# Altium PCB PCB IMU module.PcbDoc
Units mm, origin at the board's own origin, x right, y up, seen from the top; angles counter-clockwise.
Board outline 25 x 26.25 mm, 4 copper layers (L1(Sig), L2(GND), L3(GND), L4(Sig)), stack 0.749 mm thick; 55 components, 29 nets, 197 pads, 143 vias.
Unrouted connection lines stored in the file: 12.
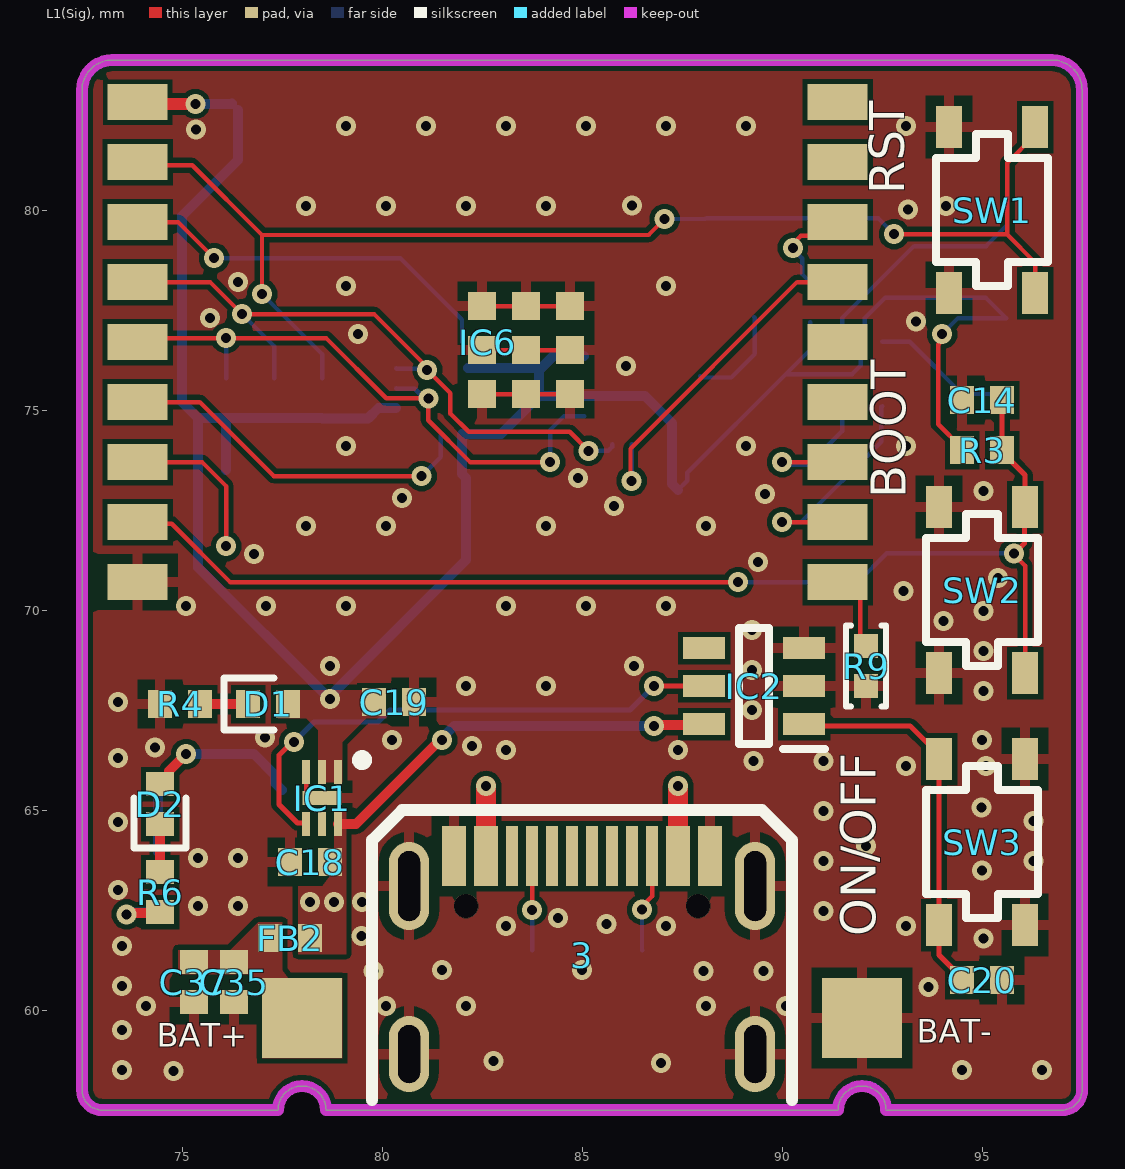
[diagram p0: L1(Sig) view]
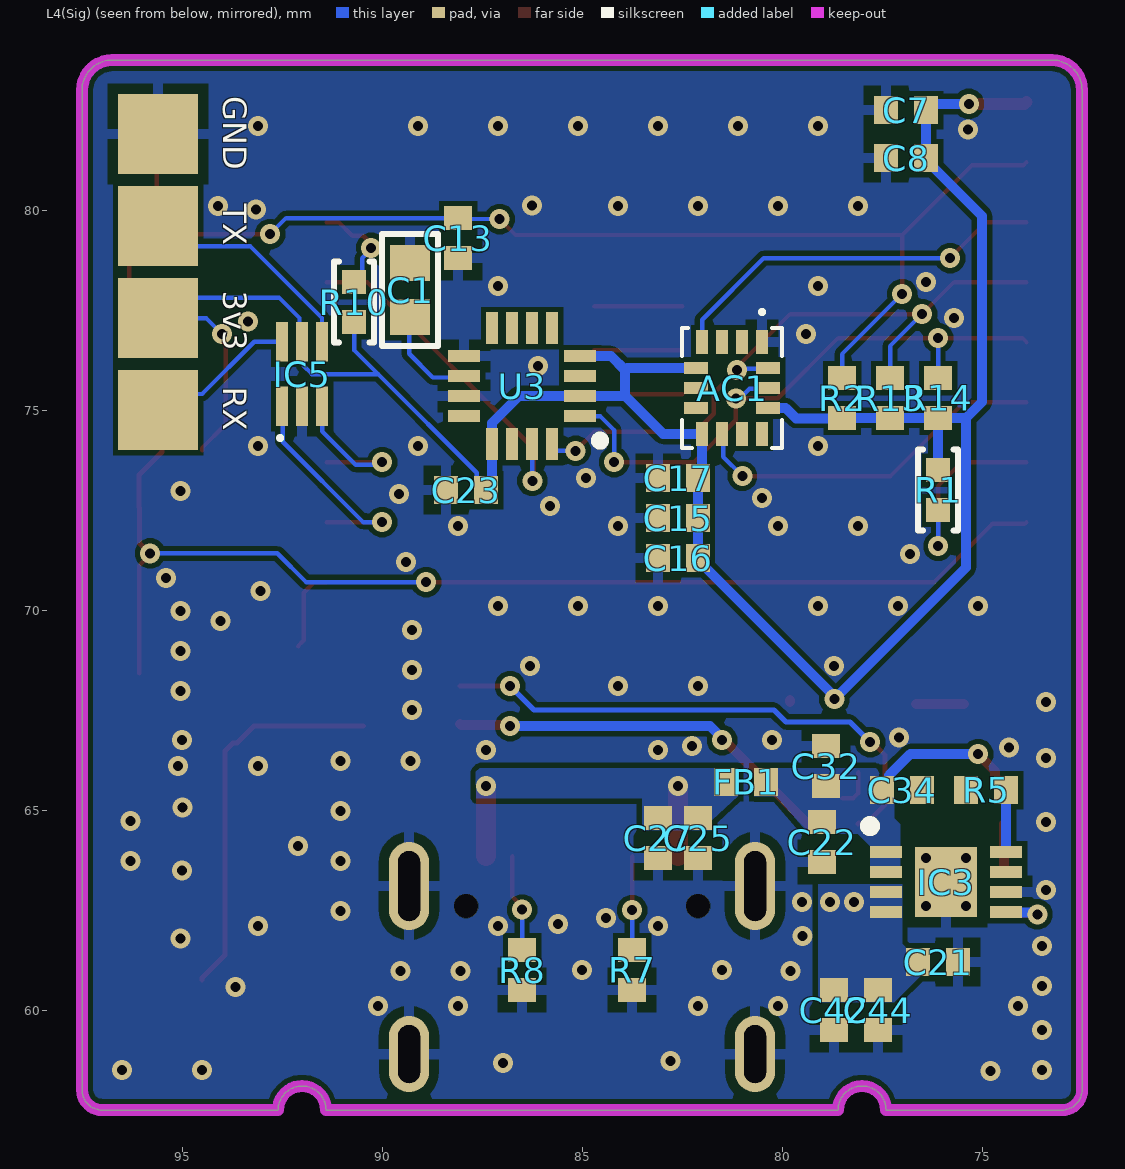
[diagram p1: L4(Sig) view, seen from below]
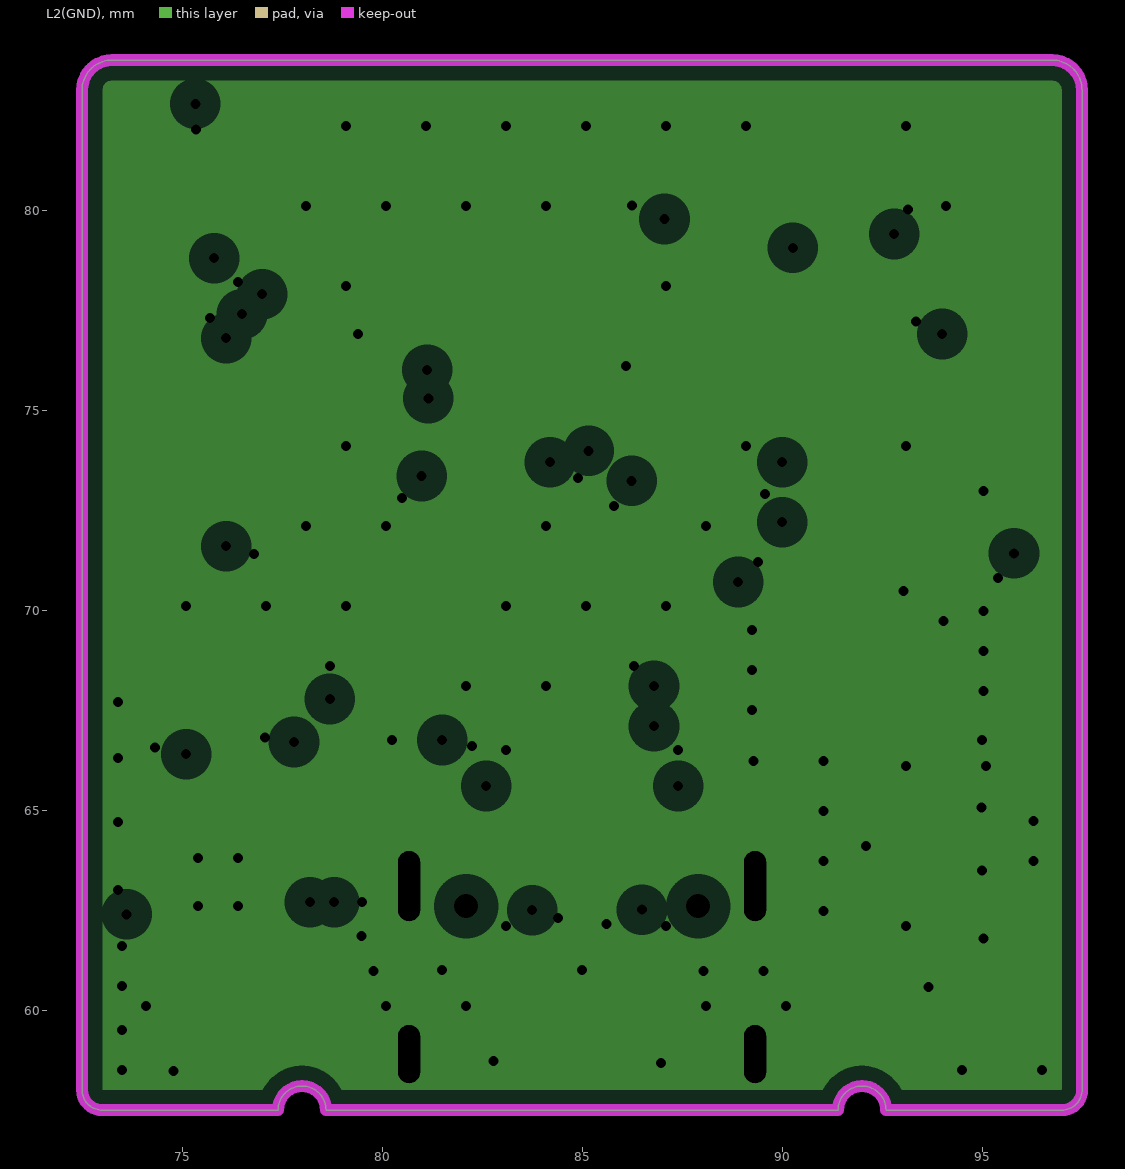
[diagram p2: L2(GND), clearances drawn from the general rule]
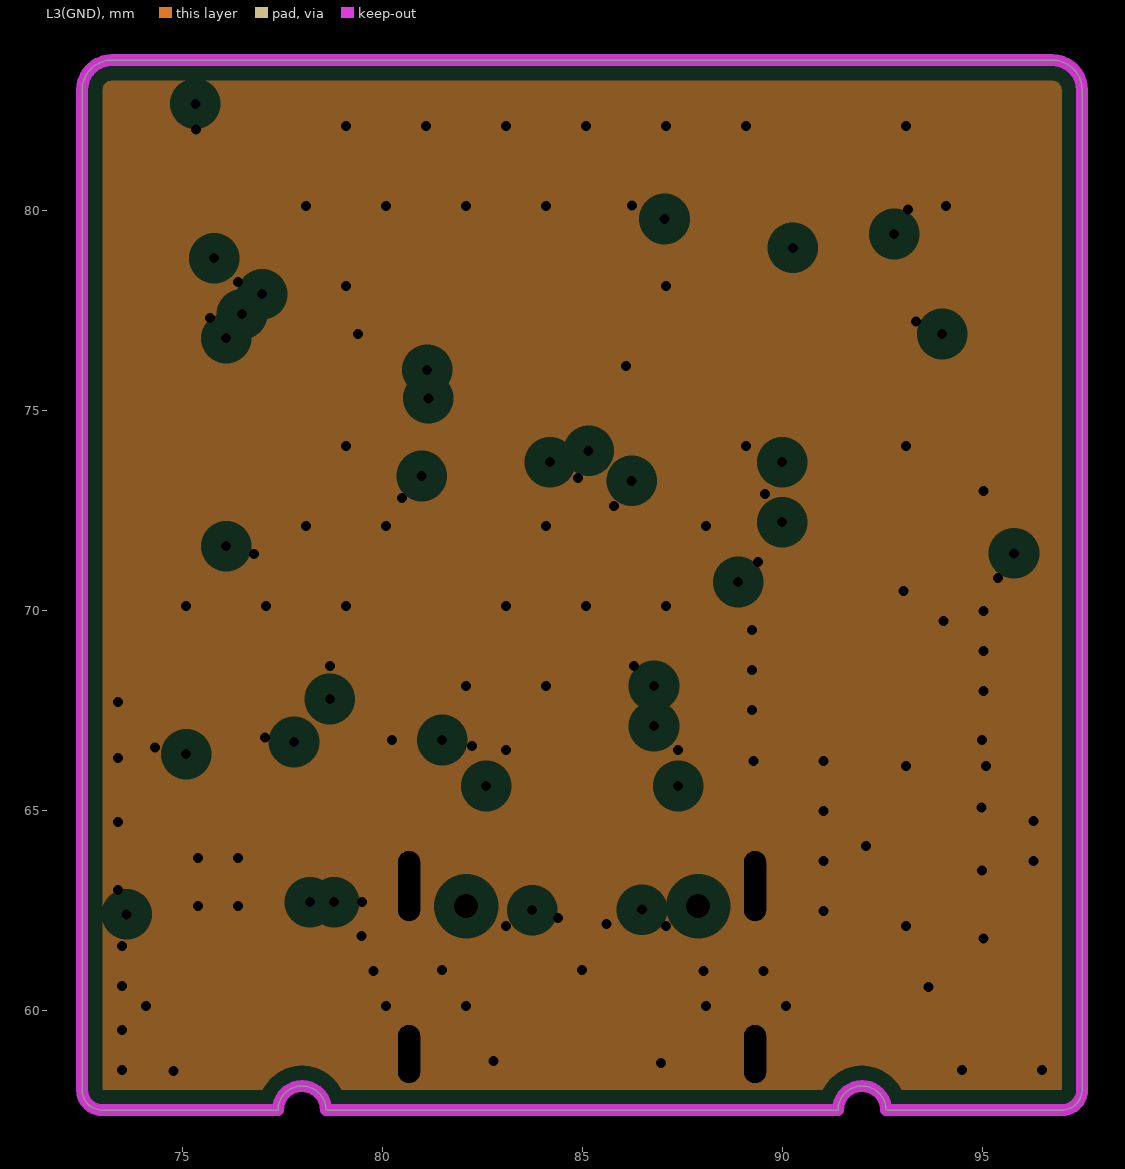
[diagram p3: L3(GND), clearances drawn from the general rule]

## Layer stack, top to bottom
Top Solder: solder mask 0.0254, SM-001, Dk 3.8
L1(Sig): signal copper 0.035
Dielectric 2: prepreg 0.0994, PP-017, Dk 4.1
L2(GND): plane copper 0.0152, net GND
Dielectric 1: core 0.45, Core-039, Dk 4.6
L3(GND): plane copper 0.0152, net GND
Dielectric 3: prepreg 0.0994, PP-017, Dk 4.1
L4(Sig): signal copper 0.035
Bottom Solder: solder mask 0.0254, SM-001, Dk 3.8

## Board outline
73,57.5 77.4,57.5 cw(c78,57.5) 78,58.1 cw(c78,57.5) 78.6,57.5 91.4,57.5 cw(c92,57.5) 92,58.1 cw(c92,57.5) 92.6,57.5 97,57.5 ccw(c97,58) 97.5,58 97.5,83 ccw(c96.75,83) 96.75,83.75 73.25,83.75 ccw(c73.25,83) 72.5,83 72.5,58 ccw(c73,58)

## Design rules (kind name [scope] priority, off if disabled: settings)
Clearance MicroVia [AsMM(ViaDiameter) = 0.3 vs AsMM(ViaDiameter) = 0.3] p1: gap=0.1 ignorepadtopadclearanceinfootprint=FALSE
Clearance USB_Poly_Clearance [(InNamedPolygon('Top_Layer-GND')) vs (OnLayer('Mechanical 3'))] p2: gap=0.254 ignorepadtopadclearanceinfootprint=FALSE except(0: Arc-Hole Track-Hole SMDPad-Hole THPad-Hole Via-Hole Fill-Hole Poly-Hole Region-Hole Text-Hole)
Clearance USB_Clearance [(InDifferentialPairClass('All Differential Pairs'))] p3: gap=0.254 ignorepadtopadclearanceinfootprint=FALSE except(0: Arc-Hole Track-Hole SMDPad-Hole THPad-Hole Via-Hole Fill-Hole Poly-Hole Region-Hole Text-Hole; 0.127: SMDPad-SMDPad)
Clearance ANT_Clerance [InNet('ANT')] p4: gap=0.203 ignorepadtopadclearanceinfootprint=FALSE except(0: Arc-Hole Track-Hole SMDPad-Hole THPad-Hole Via-Hole Fill-Hole Poly-Hole Region-Hole Text-Hole)
Clearance Polygon_Clearance [(InNamedPolygon('Top_Layer-GND')) or (InNamedPolygon('Bottom_Layer-GND'))] p5: gap=0.254 ignorepadtopadclearanceinfootprint=FALSE except(0: Arc-Hole Track-Hole SMDPad-Hole THPad-Hole Via-Hole Fill-Hole Poly-Hole Region-Hole Text-Hole)
Clearance [All] p6: gap=0.125 ignorepadtopadclearanceinfootprint=FALSE except(0: Arc-Hole Track-Hole SMDPad-Hole THPad-Hole Via-Hole Fill-Hole Poly-Hole Region-Hole Text-Hole)
ComponentClearance [All] p1 off: gap=0.254 collisioncheckmode=3 verticalgap=0.254 showdistances=FALSE
DiffPairsRouting DiffPair_mcuDiffPairsRouting [InDifferentialPair ('NewDifferentialPair2')] p1: maxlimit=0.254 minlimit=0.254 mostfreqgap=0.254 toplayer_minwidth=0.166 toplayer_maxwidth=0.166 toplayer_prefwidth=0.166 bottomlayer_minwidth=0.166 bottomlayer_maxwidth=0.166 bottomlayer_prefwidth=0.166 maxuncoupledlength=12.7
DiffPairsRouting DiffPair_USBDiffPairsRouting [InDifferentialPair ('NewDifferentialPair1')] p2: maxlimit=0.254 minlimit=0.254 mostfreqgap=0.254 toplayer_minwidth=0.166 toplayer_maxwidth=0.166 toplayer_prefwidth=0.166 bottomlayer_minwidth=0.166 bottomlayer_maxwidth=0.166 bottomlayer_prefwidth=0.166 maxuncoupledlength=12.7
FabricationTestPointUsage TestPointUsage [All] p1: valid=0 allowmultiple=FALSE
FabricationTestpoint Testpoint [All] p1: side=3 testpointundercomponent=TRUE minsize=1.016 maxsize=2.54 preferedsize=1.524 minholesize=0 maxholesize=1.016 preferedholesize=0.813 testpointgrid=0.025 allowsidetop=TRUE allowsidebottom=TRUE usegrid=TRUE gridtolerance=0
Height [All] p1 off: minheight=0 maxheight=25.4 prefheight=12.7
HoleSize [All] p1: absolutevalues=TRUE maxlimit=5 minlimit=0.1 maxpercent=80.000 minpercent=20.000
HoleToHoleClearance HoleToHoleClearance_L1L2 [InDrillLayerPair('Top Layer - Mid-Layer 1') vs InDrillLayerPair('Top Layer - Mid-Layer 1')] p1: gap=0.225 allowstackedmicrovias=TRUE
HoleToHoleClearance HoleToHoleClearance_L1L2_L1L3 [InDrillLayerPair('Top Layer - Mid-Layer 1') vs InDrillLayerPair('Top Layer - Mid-Layer 2')] p2: gap=0.225 allowstackedmicrovias=TRUE
HoleToHoleClearance HoleToHoleClearance_L1L3 [InDrillLayerPair('Top Layer - Mid-Layer 2') vs InDrillLayerPair('Top Layer - Mid-Layer 2')] p3: gap=0.225 allowstackedmicrovias=TRUE
HoleToHoleClearance HoleToHoleClearance_L1L3_L3L4 [InDrillLayerPair('Top Layer - Mid-Layer 2') vs InDrillLayerPair('Mid-Layer 2 - Mid-Layer 3')] p4: gap=0.225 allowstackedmicrovias=TRUE
HoleToHoleClearance HoleToHoleClearance_L3L4 [InDrillLayerPair('Mid-Layer 2 - Mid-Layer 3') vs InDrillLayerPair('Mid-Layer 2 - Mid-Layer 3')] p5: gap=0.225 allowstackedmicrovias=TRUE
HoleToHoleClearance HoleToHoleClearance_L3L4_L4L6 [InDrillLayerPair('Mid-Layer 2 - Mid-Layer 3') vs InDrillLayerPair('Mid-Layer 3 - Bottom Layer')] p6: gap=0.225 allowstackedmicrovias=TRUE
HoleToHoleClearance HoleToHoleClearance_L4L6 [InDrillLayerPair('Mid-Layer 3 - Bottom Layer') vs InDrillLayerPair('Mid-Layer 3 - Bottom Layer')] p7: gap=0.225 allowstackedmicrovias=TRUE
HoleToHoleClearance HoleToHoleClearance_L1L2_L1L6 [InDrillLayerPair('Top Layer - Mid-Layer 1') vs InDrillLayerPair('Top Layer - Bottom Layer')] p8: gap=0.275 allowstackedmicrovias=FALSE
HoleToHoleClearance HoleToHoleClearance_L1L3_L1L6 [InDrillLayerPair('Top Layer - Mid-Layer 2') vs InDrillLayerPair('Top Layer - Bottom Layer')] p9: gap=0.275 allowstackedmicrovias=FALSE
HoleToHoleClearance HoleToHoleClearance_L3L4_L1L6 [InDrillLayerPair('Mid-Layer 2 - Mid-Layer 3') vs InDrillLayerPair('Top Layer - Bottom Layer')] p10: gap=0.275 allowstackedmicrovias=FALSE
HoleToHoleClearance HoleToHoleClearance_L4L6_L1L6 [InDrillLayerPair('Mid-Layer 3 - Bottom Layer') vs InDrillLayerPair('Top Layer - Bottom Layer')] p11: gap=0.275 allowstackedmicrovias=FALSE
HoleToHoleClearance HoleToHoleClearance_L1L6 [InDrillLayerPair('Top Layer - Bottom Layer') vs InDrillLayerPair('Top Layer - Bottom Layer')] p12: gap=0.45 allowstackedmicrovias=FALSE
HoleToHoleClearance [All] p13: gap=0.254 allowstackedmicrovias=TRUE
MatchedLengths DiffPair_mcuMatchedLengths [InDifferentialPair ('NewDifferentialPair2')] p1: tolerance=25.4 checknetsindiffpair=FALSE checkdiffpairvsdiffpair=TRUE checkxsignals=TRUE checkothers=TRUE
MatchedLengths DiffPair_USBMatchedLengths [InDifferentialPair ('NewDifferentialPair1')] p2: tolerance=25.4 checknetsindiffpair=FALSE checkdiffpairvsdiffpair=TRUE checkxsignals=TRUE checkothers=TRUE
MatchedLengths DiffPair_DIFF_USBMatchedLengths [InDifferentialPairClass('DIFF_USB')] p3: tolerance=25.4 checknetsindiffpair=FALSE checkdiffpairvsdiffpair=TRUE checkxsignals=TRUE checkothers=TRUE
MinimumAnnularRing [All] p1 off: minimumring=0.152
MinimumSolderMaskSliver [HasFootprint('ALL')] p1: minsoldermaskwidth=0.097
NetAntennae [All] p1 off: netantennaetolerance=0
PlaneClearance [All] p1: clearance=0.508
PlaneConnect [All] p1: planeconnectstyle=Direct reliefexpansion=0.508 reliefentries=4 reliefconductorwidth=0.254 reliefairgap=0.254
PolygonConnect PolygonConnect_1 [isVia and innet(gnd) or isVia and innet('VDD') or InNet('NetBAT+_1') or InNet('Vbat') or InNet('VDD')or InNet('Vin') or InNet('NetC9_2')or InNet('3v3')] p1: connectstyle=Direct reliefconductorwidth=0.254 reliefentries=4 polygonreliefangle="90 Angle" airgapwidth=0.254
PolygonConnect [All] p2: connectstyle=Relief reliefconductorwidth=0.254 reliefentries=4 polygonreliefangle="90 Angle" airgapwidth=0.254
RoutingVias [All] p1: holewidth=0.25 width=0.5 viastyle="Through Hole" minholewidth=0.1 minwidth=0.1 maxholewidth=0.711 maxwidth=1.27
SilkToSolderMaskClearance SilkscreenOverComponentPads [HasFootprint('All')] p1: minsilkscreentomaskgap=0.254 clearancetoexposedcopper=TRUE
SolderMaskExpansion SolderMaskExpansion_via [IsVia] p1: expansion=0.076 istentingtop=TRUE
SolderMaskExpansion [All] p2: expansion=0.076 istentingtop=FALSE
UnRoutedNet [InNet('ANT')] p1:
Width [All] p1: maxlimit=10.16 minlimit=0.11 preferedwidth=0.125 minimp=50.000000 maximp=50.000000 favimp=50.000000
17 further rules are at their usual default settings.

## Classes and differential pairs
component class Designator: 3v3 C7 C8 C13 C14 GND IC5 IC6 R1 R2 R3 R9 R10 R13 R14 RX SW1 SW2 TX

## Components (designator, comment, footprint, x,y, rotation, side; value= is the part's Value field where it differs from the comment)
3 "TYPE-C-31-M-12" TYPE-C-31-M-12 85,61 r0 top (schematic designator J1)
3v3 "3v3" PAD_SQ_2MM 95.6,77.3 r270 bottom
AC1 "ICM-40627" ICM-40627 81.25,75.55 r270 bottom
BAT+ "BAT+" PAD_SQ_2MM 78,59.8 r90 top
BAT- "BAT-" PAD_SQ_2MM 92,59.8 r90 top
C1 "Ceramic_Capacitor" "CAP 0603/1608" 89.3,78 r90 bottom value=10µF
C7 "C0402_10V" CAP_0402 76.9,82.5 r180 bottom value=10uF
C8 "C0402_10V" CAP_0402 76.9,81.3 r180 bottom value=100nF
C13 "C0402_10V" CAP_0402 88.1,79.3 r270 bottom value=100nF
C14 "C0402_10V" CAP_0402 95,75.25 r180 top value=100nF
C15 "C0402_10V" CAP_0402 82.6,72.3 r180 bottom value=10nF
C16 "C0402_10V" CAP_0402 82.6,71.3 r180 bottom value=100nF
C17 "C0402_10V" CAP_0402 82.6,73.3 r180 bottom value=2.2uF
C18 "C0402_10V" CAP_0402 78.2,63.7 r0 top value=2.2uF
C19 "C0402_10V" CAP_0402 80.3,67.7 r180 top value=2.2uF
C20 "C0402_10V" CAP_0402 95,60.75 r0 top value=100nF
C21 "C0402_10V" CAP_0402 76.1,61.2 r0 bottom value=4.7uF
C22 "C0402_10V" CAP_0402 79,64.2 r90 bottom value=4.7uF
C23 "C0402_10V" CAP_0402 87.9,73 r180 bottom value=4.7uF
C25 "C0402_10V" CAP_0402 82.1,64.3 r90 bottom value=10uF
C27 "C0402_10V" CAP_0402 83.1,64.3 r90 bottom value=100nF
C32 "C0402_10V" CAP_0402 78.9,66.1 r270 bottom value=100nF
C34 "C0402_10V" CAP_0402 77,65.5 r0 bottom value=10uF
C35 "C0402_10V" CAP_0402 76.3,60.7 r90 top value=10uF
C37 "C0402_10V" CAP_0402 75.3,60.7 r90 top value=100nF
C42 "C0402_10V" CAP_0402 78.7,60 r90 bottom value=100nF
C44 "C0402_10V" CAP_0402 77.6,60 r90 bottom value=10uF
D1 "GREEN" LED_0402_GREEN 77.15,67.65 r180 top
D2 "GREEN" LED_0402_GREEN 74.45,65.15 r270 top
FB1 "FB0402" FB_0402 80.9,65.7 r180 bottom
FB2 "FB0402" FB_0402 77.7,61.8 r0 top
GND "GND" PAD_SQ_2MM 95.6,81.9 r270 bottom
IC1 "MIC5528-3.3YMT-T5" SON40P120X120X60-7N-D 78.5,65.3 r270 top
IC2 "MAX16054AZT+T" SOT95P275X110-6N 89.3,68.1 r180 top
IC3 "MCP73831T-2ATI/MC" SON65P300X300X80-9N-D 77.007,64.716 r180 bottom
IC5 "USBLC6-2P6" USBLC62P6 92,75.9 r180 bottom
IC6 "ESP32-C3-WROOM-02-N4" ESP32C3WROOM02N4 83.6,76.5 r0 top
R1 "Resistor" "RES 0402/1005" 76.1,73 r90 bottom value=10k
R2 "R0402" RES_0402 78.5,75.3 r270 bottom value=5.1k
R3 "R0402" RES_0402 95,74 r180 top value=5.1k
R4 "R0402" RES_0402 74.95,67.65 r180 top value=1k
R5 "R0402" RES_0402 74.9,65.5 r0 bottom value=2k
R6 "R0402" RES_0402 74.45,62.95 r270 top value=1k
R7 "R0402" RES_0402 83.75,61 r270 bottom value=5.1k
R8 "R0402" RES_0402 86.5,61 r270 bottom value=5.1k
R9 "Resistor" "RES 0402/1005" 92.1,68.6 r270 top value=10k
R10 "Resistor" "RES 0402/1005" 90.7,77.7 r270 bottom value=10k
R13 "R0402" RES_0402 77.3,75.3 r270 bottom value=5.1k
R14 "R0402" RES_0402 76.1,75.3 r270 bottom value=5.1k
RX "RX" PAD_SQ_2MM 95.6,75 r270 bottom
SW1 "SKRPANE010" SKRPANE010 95.25,80 r90 top
SW2 "SKRPANE010" SKRPANE010 95,70.5 r90 top
SW3 "SKRPANE010" SKRPANE010 95,64.2 r270 top
TX "TX" PAD_SQ_2MM 95.6,79.6 r270 bottom
U3 "MMC5983MA" MMC5983MA-LGA 86.5,75.6 r270 bottom

## Footprints (in the part's own frame and the unit in brackets; to place one, negate y for a bottom-side part, rotate by r counter-clockwise, add the part's x,y. Pads: shape width x height; smd on the part's side, far side on the other; paste and mask are expansions set on the pad)
"CAP 0603/1608" [mm]
  rect 0.9x1 smd: 1(-0.675,0) 2(0.675,0)
  silkscreen extent -1.4,-0.7 1.4,0.7, body extent -0.8,-0.41 0.8,0.41, height 0.82
CAP_0402 [mm]
  rect 0.6x0.7 smd: 1(-0.5,0) 2(0.5,0)
  body extent -0.5,-0.26 0.5,0.27, height 0.37
ESP32C3WROOM02N4 [mm]
  rect 1.5x0.9 smd: 1(-9.71,6.2) 2(-9.71,4.7) 3(-9.71,3.2) 4(-9.71,1.7) 5(-9.71,0.2) 6(-9.71,-1.3) 7(-9.71,-2.8) 8(-9.71,-4.3) 9(-9.71,-5.8) 10(7.79,-5.8) 11(7.79,-4.3) 12(7.79,-2.8) 13(7.79,-1.3) 14(7.79,0.2) 15(7.79,1.7) 16(7.79,3.2) 17(7.79,4.7) 18(7.79,6.2)
  rect 0.7x0.7 smd: 19(0,0) 20(1.1,0) 21(1.1,1.1) 22(0,1.1) 23(-1.1,1.1) 24(-1.1,0) 25(-1.1,-1.1) 26(0,-1.1) 27(1.1,-1.1)
  body extent -10.31,-6.7 7.69,13.3, height 3.2
FB_0402 [mm]
  rect 0.6x0.7 smd: 1(-0.5,0) 2(0.5,0)
  body extent -0.5,-0.25 0.5,0.25, height 0.51
ICM-40627 [mm]
  rect 0.6x0.3 smd: 1(-1.15,0.75) 2(-1.15,0.25) 3(-1.15,-0.25) 4(-1.15,-0.75) 8(1.15,-0.75) 9(1.15,-0.25) 10(1.15,0.25) 11(1.15,0.75)
  rect 0.3x0.6 smd: 5(-0.5,-0.9) 6(0,-0.9) 7(0.5,-0.9) 12(0.5,0.9) 13(0,0.9) 14(-0.5,0.9)
  silkscreen extent -1.95,-1.25 1.5,1.25, body extent -1.5,-1.25 1.5,1.25, height 0.9
LED_0402_GREEN [mm]
  rect 0.6x0.7 smd: A(-0.5,0) K(0.5,0)
  silkscreen extent -0.15,-0.65 1.1,0.65, body extent -0.51,-0.25 0.51,0.25, height 0.45
MMC5983MA-LGA [mm]
  rect 0.3x0.8 smd mask+0.05: 1(0.75,1.45) 2(0.25,1.45) 3(-0.25,1.45) 4(-0.75,1.45) 9(-0.75,-1.45) 10(-0.25,-1.45) 11(0.25,-1.45) 12(0.75,-1.45)
  rect 0.8x0.3 smd mask+0.05: 5(-1.45,0.75) 6(-1.45,0.25) 7(-1.45,-0.25) 8(-1.45,-0.75) 13(1.45,-0.75) 14(1.45,-0.25) 15(1.45,0.25) 16(1.45,0.75)
  silkscreen extent 1.26,1.85 1.47,2.05, body extent -1.55,-1.55 1.55,1.55, height 0.99
PAD_SQ_2MM [mm]
  rect 2x2 smd paste-1: 1(0,0)
"RES 0402/1005" [mm]
  rect 0.6x0.6 smd: 1(-0.5,0) 2(0.5,0)
  silkscreen extent -1.02,-0.5 1.02,0.5, body extent -0.5,-0.25 0.5,0.25, height 0.35
RES_0402 [mm]
  rect 0.6x0.7 smd: 1(-0.5,0) 2(0.5,0)
  body extent -0.5,-0.25 0.5,0.25, height 0.3
SKRPANE010 [mm]
  rect 1.05x0.65 smd: 12(-2.075,1.075) 12(2.075,1.075) 34(-2.075,-1.075) 34(2.075,-1.075)
  silkscreen extent -1.9,-1.4 1.9,1.4, body extent -2.3,-1.6 2.3,1.6, height 2.51
SON40P120X120X60-7N-D [mm]
  rect 0.6x0.2 smd: 1(-0.65,0.4) 2(-0.65,0) 3(-0.65,-0.4) 4(0.65,-0.4) 5(0.65,0) 6(0.65,0.4)
  rect 0.35x0.99 smd: 7(0,0)
  silkscreen extent -1.07,0.88 -0.83,1.13, body extent -0.65,-0.6 0.65,0.6, height 0.6
SON65P300X300X80-9N-D [mm]
  rect 0.8x0.3 smd: 1(-0.393,-0.766) 2(-0.393,-1.266) 3(-0.393,-1.766) 4(-0.393,-2.266) 5(2.607,-2.266) 6(2.607,-1.766) 7(2.607,-1.266) 8(2.607,-0.766)
  rect 1.55x1.75 smd: 9(1.107,-1.516)
  silkscreen extent -0.92,-0.24 -0.67,0.01, body extent -0.44,-2.52 2.66,-0.52, height 1
SOT95P275X110-6N [mm]
  rect 1.05x0.55 smd: 1(-1.25,0.95) 2(-1.25,0) 3(-1.25,-0.95) 4(1.25,-0.95) 5(1.25,0) 6(1.25,0.95)
  silkscreen extent -1.78,-1.45 0.38,1.58, body extent -1.38,-1.45 1.38,1.45, height 1.1
TYPE-C-31-M-12 [mm]
  rect 0.6x1.5 smd mask+0.07: A1B12(-3.2,2.85) B1A12(3.2,2.85)
  rect 0.6x1.5 smd mask+0.14: A4B9(-2.4,2.85) B4A9(2.4,2.85)
  rect 0.3x1.5 smd mask+0.14: A5(-1.25,2.85) A6(-0.25,2.85) A7(0.25,2.85) A8(1.25,2.85) B5(1.75,2.85) B6(0.75,2.85) B7(-0.75,2.85) B8(-1.75,2.85)
  round 0.6 hole 0.6 unplated mask+0.3: MH(-2.9,1.6) MH(2.9,1.6)
  oval 1x1.9 hole 0.55 slot 1.45 at 90 deg mask+0.05: SH(-4.325,-2.1) SH(4.325,-2.1)
  oval 1x2.2 hole 0.55 slot 1.75 at 90 deg mask+0.05: SH(-4.325,2.1) SH(4.325,2.1)
  silkscreen extent -5.25,-3.25 5.25,4, body extent -4.47,-4.65 4.47,3.25, height 3.32
USBLC62P6 [mm]
  rect 0.3x0.99 smd: 1(-0.5,-0.805) 2(0,-0.805) 3(0.5,-0.805) 4(0.5,0.805) 5(0,0.805) 6(-0.5,0.805)
  silkscreen extent -0.6,-1.65 -0.5,-1.55, body extent -0.75,-0.75 0.75,0.75, height 0.46

## Part data
3: "USB Type C Connector Horizontal SMT", Manufacturer="Koren Hroparts", Manufacturer Part Number=TYPE-C-31-M-12
3v3 BAT+ BAT- GND RX TX: library part PAD_SQ_2MM, "Test Point Square 2mm"
AC1: "Accelerometer", Manufacturer_Name=TDK, Mouser Part Number=410-ICM-40627, Arrow Part Number=ICM-40627, Arrow Price/Stock=https://www.arrow.com/en/products/icm-40627/invensense?region=nac, Datasheet Link=https://3cfeqx1hf82y3xcoull08ihx-wpengine.netdna-ssl.com/wp-content/uploads/2021/04/DS-000381-ICM-40627-v1.2.pdf, Manufacturer_Part_Number=ICM-40627, Mouser Price/Stock=https://www.mouser.co.uk/ProductDetail/TDK-InvenSense/ICM-40627?qs=iLbezkQI%252BsgePVjJNSY7vQ%3D%3D
C1: library part 0603ZD106MAT2A, "CAP CER 10UF 10V X5R 20% 0603", Dielectric=X5R, Manufacturer=AVX, Temperature Range="-55 ~ 125C", Tolerance=20%, Voltage=10V, Component Link=https://www.tme.eu/pl/details/0603zd106mat2a/, Footprint.=0603, Manufacturer Part Number=0603ZD106MAT2A, Part Name=0603ZD106MAT2A, Supplier=TME, Supplier Part Number=0603ZD106MAT2A, Type=Ceramic
C7 C8 C13 C14 C15 C16 C17 C18 C19 C20 C21 C22 C23 C25 C27 C32 C34 C35 C37 C42 C44: library part CAP_0402_10V, "Capacitor SMD 0402 10V"
D1 D2: library part LED_0402_GREEN, "LED 0402 GREEN SMD"
FB1 FB2: library part FB_0402, "Ferrite Bead SMD 0402"
IC1: "LDO 3v3 500mA", Manufacturer_Name=Microchip, Mouser Part Number=998-MIC5528-3.3YMTT5, Arrow Part Number=MIC5528-3.3YMT-T5, Arrow Price/Stock=https://www.arrow.com/en/products/mic5528-3.3ymt-t5/microchip-technology?region=nac, Datasheet Link=https://nl.mouser.com/datasheet/2/268/MIC5528_High_Performance_500mA_LDO_in_Thin_and_Ext-1891284.pdf, Height=0.6mm, Manufacturer_Part_Number=MIC5528-3.3YMT-T5, Mouser Price/Stock=https://www.mouser.co.uk/ProductDetail/Microchip-Technology/MIC5528-3.3YMT-T5?qs=U6T8BxXiZAUrsVLummtswg%3D%3D
IC2: "Integrated Circuit", Manufacturer_Name="Analog Devices", Mouser Part Number=700-MAX16054AZTT, Arrow Part Number=MAX16054AZT+T, Arrow Price/Stock=https://www.arrow.com/en/products/max16054aztt/maxim-integrated?region=nac, Datasheet Link=https://datasheet.datasheetarchive.com/originals/distributors/SFDatasheet-4/sf-00087822.pdf, Height=1.1mm, Manufacturer_Part_Number=MAX16054AZT+T, Mouser Price/Stock=https://www.mouser.co.uk/ProductDetail/Analog-Devices-Maxim-Integrated/MAX16054AZT%2bT?qs=CDqwynd4ZNoG75aAAjGoqQ%3D%3D
IC3: "Battery Management Charge mgnt contr", Manufacturer_Name=Microchip, Mouser Part Number=579-MCP73831T-2ATIMC, Datasheet Link=https://www.mouser.pl/datasheet/2/268/20001984g-846362.pdf, Manufacturer_Part_Number=MCP73831T-2ATI/MC
IC5: "Integrated Circuit", Manufacturer_Name=STMicroelectronics, Mouser Part Number=511-USBLC6-2P6, Arrow Part Number=USBLC6-2P6, Arrow Price/Stock=https://www.arrow.com/en/products/usblc6-2p6/stmicroelectronics?region=nac, Datasheet Link=https://datasheet.lcsc.com/szlcsc/STMicroelectronics-USBLC6-2P6_C15999.pdf, Height=0.6mm, Manufacturer_Part_Number=USBLC6-2P6, Mouser Price/Stock=https://www.mouser.co.uk/ProductDetail/STMicroelectronics/USBLC6-2P6?qs=6ARB0lp6jlViGcbUSvj1Mw%3D%3D
IC6: "Multiprotocol Modules SMD module, ESP32-C3, 4MB SPI flash, PCB antenna, -40 C +85 C", Part Name=ESP32-C3-WROOM-02-N4
R1 R9 R10: library part CRCW040210K0JNTDBC, "RES SMD 10k OHM 5% 1/16W 0402", Manufacturer="Royal Ohm", Power Rating="63mW, 1/16W", Temperature Range="-55 ~ 155C", Tolerance=5%, Component Link=https://www.tme.eu/pl/details/smd0402-10k/rez, Footprint.=0402, Manufacturer Part Number=CRCW040210K0JNTDBC, Part Name=CRCW040210K0JNTDBC, Supplier=TME, Supplier Part Number=CRCW040210K0JNTDBC
R2 R3 R4 R5 R6 R7 R8 R13 R14: library part RES_0402, "Resistor SMD 0402"
SW1 SW2 SW3: "Tactile Switch SMD SPST", Manufacturer="Alps Alpine", Manufacturer Part Number=SKRPANE010
U3: "±8 Gauss, High Performance 3-axis Magnetic Sensor I2C/SPI", Manufacturer=MEMSIC, Manufacturer Part Number=MMC5983MA

## Via types
v1: diameter 0.5, hole 0.25, L1(Sig) to L4(Sig), tented both sides, 143 vias

## Nets (pads, with @x,y where several pads share a name; then routed paths per layer and width w, separated by ;. In a path a pad name is that pad's centre, name@x,y a point inside that pad or via, vN(x,y) a via of type N, cw(c..) or ccw(c..) an arc to the next point about the centre after c; other vN are vias at no path point)
3v3: 3v3.1 AC1.5 AC1.8 AC1.12 C7.2 C8.2 C15.2 C16.2 C17.2 C19.2 C23.2 D1.A IC1.1 IC1.2 IC5.5 IC6.1 R1.2 R2.2 R3.2 R10.2 R13.2 R14.2 U3.2 U3.4 U3.13 | length 62.7
  L1(Sig) w0.11: v1(94,76.9) 93.925,76.825 93.925,76.661 93.905,76.641 93.905,74.645 94.5,74.05 R3.2
  L1(Sig) w0.25: C19.2 C19.2@79.8,67.75
  L1(Sig) w0.3: IC6.1 73.936,82.654 v1(75.332,82.654)
  L4(Sig) w0.11: C23.2 87.632,73.232 87.632,73.432 90.1,75.9 ; R10.2 90.7,76.5 90.1,75.9 ; v1(94,76.9) 94.4,77.3 3v3.1 95.087,77.813 92.577,77.813 92.065,77.301 92.065,76.77 IC5.5 91.963,76.668 91.963,76.109 91.754,75.9 90.1,75.9
  L4(Sig) w0.25: v1(75.332,82.654) 76.25,82.654 C7.2@76.25,82.662 ; R1.2 R14.2 ; C7.2 C8.2 76.4,81.25 75,79.85 75,75.2 75.4,74.8 ; R2.2 R13.2 R14.2 ; R2.2@78.505,74.795 79.654,74.795 79.91,75.05 AC1.12 ; AC1.5 83.867,76.05 83.922,75.994 ; U3.4 84.278,76.35 83.922,75.994 ; C23.2 87.25,73.15 U3.13 87.25,74.675 86.575,75.35 U3.2 83.922,75.35 ; 75.4,74.8 75.4,71.068 v1(78.692,67.776) 78.692,67.842 82.1,71.25 C16.2 C15.2 C17.2 82,73.4 AC1.8 82.973,74.4 83.922,75.35 ; 75.4,74.8 R14.2 ; 83.922,75.35 83.922,75.994
GND: 3.A1B12 3.B1A12 3.SH AC1.1 AC1.6 BAT-.1 C1.2 C7.1 C8.1 C13.2 C14.2 C15.1 C16.1 C17.1 C18.1 C19.1 C20.2 C21.1 C22.1 C23.1 C25.1 C27.1 C32.1 C34.1 C35.1 C37.1 C42.1 C44.1 GND.1 IC1.3 IC1.7 IC2.2 IC2.3 IC3.6 IC3.9 IC5.2 IC6.9 IC6.19 IC6.20 IC6.21 IC6.22 IC6.23 IC6.24 IC6.25 IC6.26 IC6.27 R4.2 R5.2 R7.2 R8.2 R9.2 SW1.12 SW2.12 SW3.12 U3.9 U3.11 | length 7.6
  L1(Sig) w0.11: IC1.3 78.1,65.42 78.22,65.3 IC1.7 ; IC6.25 IC6.26 IC6.27 ; IC6.24 IC6.19 IC6.20 ; IC6.23 IC6.22 IC6.21
  other v1: 74.784,58.475 73.5,58.5 94.5,58.5 96.5,58.5 86.972,58.675 82.784,58.725 73.5,59.5 74.1,60.1 80.1,60.1 82.1,60.1 88.1,60.1 90.1,60.1 93.665,60.579 73.498,60.607 79.784,60.975 88.034,60.975 89.534,60.975 81.5,61 85,61 73.498,61.607 95.038,61.787 79.492,61.853 83.1,62.1 87.1,62.1 93.1,62.1 85.607,62.151 84.4,62.3 91.034,62.475 75.4,62.6 76.4,62.6 79.5,62.7 73.4,63 95.001,63.49 91.034,63.725 96.284,63.725 75.4,63.8 76.4,63.8 92.1,64.1 73.4,64.7 96.284,64.725 91.034,64.975 94.983,65.064 93.1,66.1 95.1,66.1 89.284,66.225 91.034,66.225 73.4,66.3 83.1,66.5 87.4,66.5 74.327,66.563 82.25,66.6 80.25,66.75 95,66.75 77.077,66.813 89.25,67.5 73.4,67.7 95.034,67.975 82.1,68.1 84.1,68.1 89.25,68.5 78.7,68.6 86.3,68.6 95.034,68.975 89.25,69.5 94.034,69.725 95.034,69.975 75.1,70.1 77.1,70.1 79.1,70.1 83.1,70.1 85.1,70.1 87.1,70.1 93.034,70.475 95.4,70.8 89.4,71.2 76.8,71.4 78.1,72.1 80.1,72.1 84.1,72.1 88.1,72.1 85.8,72.6 80.5,72.8 89.578,72.905 95.034,72.975 84.9,73.3 79.1,74.1 89.1,74.1 93.1,74.1 86.1,76.1 79.4,76.9 93.349,77.218 75.7,77.3 79.1,78.1 87.1,78.1 76.4,78.2 93.149,80.018 78.1,80.1 80.1,80.1 82.1,80.1 84.1,80.1 86.249,80.118 94.1,80.1 75.349,82.018 79.1,82.1 81.1,82.1 83.1,82.1 85.1,82.1 87.1,82.1 89.1,82.1 93.1,82.1
GPIO9: C14.1 IC6.8 R3.1 SW2.34 | length 30.1
  L1(Sig) w0.11: IC6.8 73.931,72.159 74.741,72.159 76.2,70.7 v1(88.9,70.7) ; v1(95.799,71.418) 95.799,71.382 96.075,71.107 SW2.34@96.075,68.425
  L1(Sig) w0.125: C14.1 R3.1 95.5,73.95 96.075,73.375 96.075,72.575 96.062,72.562 96.062,71.67 95.81,71.418 v1(95.799,71.418)
  L4(Sig) w0.11: v1(88.9,70.7) 91.9,70.7 92.618,71.418 v1(95.799,71.418)
I2C.SCK: AC1.13 IC6.5 R14.1 U3.1 | length 15.7
  L1(Sig) w0.11: IC6.5 73.99,76.8 v1(76.1,76.8) 78.6,76.8 80.106,75.294 v1(81.157,75.294) 81.157,74.743 82.2,73.7 v1(84.2,73.7)
  L4(Sig) w0.11: R14.1 v1(76.1,76.8) ; AC1.13 80.37,75.53 80.815,75.53 81.051,75.294 v1(81.157,75.294) ; v1(84.2,73.7) 84.2,74.5 84.549,74.849 U3.1@85.049,74.849
I2C.SDA: AC1.14 IC6.4 R13.1 U3.16 | length 16.8
  L1(Sig) w0.11: IC6.4 75.7,78.2 v1(76.5,77.4) 79.8,77.4 81.125,76.075 v1(81.125,76.006) 81.708,75.423 81.708,74.911 82.164,74.455 84.691,74.455 v1(85.163,73.983)
  L4(Sig) w0.11: v1(76.5,77.4) 77.3,76.6 R13.1 ; AC1.14 80.372,76.028 81.104,76.028 v1(81.125,76.006) ; v1(85.163,73.983) 85.655,73.983 85.75,74.078 U3.16
LDO_EN: IC1.4 IC2.5 | length 13.5
  L1(Sig) w0.125: v1(77.8,66.7) 77.751,66.7 77.422,66.371 77.422,65.14 77.886,64.676 78.081,64.676 IC1.4@78.1,64.657 ; v1(86.8,68.1) IC2.5
  L4(Sig) w0.125: v1(77.8,66.7) 78.3,67.2 79.9,67.2 80.2,67.5 86.2,67.5 v1(86.8,68.1)
NetAC1_4: AC1.4 IC6.3 | length 9.7
  L1(Sig) w0.11: IC6.3 74.9,79.7 v1(75.8,78.8)
  L4(Sig) w0.11: v1(75.8,78.8) 80.458,78.8 81.998,77.259 81.998,76.702 AC1.4
NetAC1_9: AC1.9 IC6.6 | length 9.1
  L1(Sig) w0.11: IC6.6 75.441,75.2 77.291,73.35 v1(80.991,73.35)
  L4(Sig) w0.11: v1(80.991,73.35) 81.47,73.829 81.47,74.37 AC1.9
NetBAT+_1: BAT+.1 C35.2 C37.2 FB2.1
NetC1_1: C1.1 U3.10 | length 2.6
  L4(Sig) w0.11: U3.10 87.985,75.815 88.731,75.815 89.321,76.405 89.321,77.304 C1.1
NetC13_1: C13.1 IC6.2 R2.1 SW1.34 | length 31.8
  L1(Sig) w0.11: IC6.2 73.968,81.122 75.253,81.122 76.998,79.377 ; v1@76.998,77.902 76.998,79.377 ; v1(87.062,79.777) 86.663,79.377 76.998,79.377 ; v1(92.8,79.4) 95.614,79.4 96.325,78.689 SW1.34@96.325,77.925 ; 95.633,79.382 95.633,81.183 96.325,81.875 SW1.34@96.325,82.075
  L4(Sig) w0.11: v1(77,77.9) 78.5,76.4 R2.1 ; v1(87.062,79.777) 88.077,79.777 C13.1 92.4,79.8 v1(92.8,79.4)
NetC20_1: C20.1 IC2.1 SW3.34 | length 9.7
  L1(Sig) w0.125: IC2.1@90.464,67.1 93.202,67.1 93.627,66.675 93.725,66.675 93.925,66.475 93.925,62.125 93.925,61.375 94.5,60.8 C20.1
NetD1_K: D1.K R4.1 | length 1.2
  L1(Sig) w0.25: R4.1 D1.K
NetD2_K: D2.K R6.1 | length 1.2
  L1(Sig) w0.25: R6.1 D2.K
NetIC3_5: IC3.5 R6.2 | length 1.7
  L1(Sig) w0.25: v1(73.617,62.393) 73.645,62.422 74.422,62.422 R6.2
  L4(Sig) w0.25: v1(73.617,62.393) 73.658,62.435 74.385,62.435 IC3.5
NetIC3_8: IC3.8 R5.1 | length 1.5
  L4(Sig) w0.25: IC3.8 R5.1
NetIC5_4: IC5.4 TX.1 | length 5.6
  L4(Sig) w0.11: IC5.4 91.501,77.301 93.3,79.1 95.1,79.1 TX.1
NetIC5_6: IC5.6 RX.1 | length 3.8
  L4(Sig) w0.11: IC5.6 93.195,76.705 94.499,75.401 95.199,75.401 RX.1
NetIC6_7: IC6.7 R1.1 | length 4.9
  L1(Sig) w0.11: IC6.7 75.5,73.7 76.1,73.1 v1(76.1,71.6)
  L4(Sig) w0.11: v1(76.1,71.6) R1.1
NetIC6_10: IC6.10 R9.1 | length 2.1
  L1(Sig) w0.11: IC6.10 91.69,70.7 91.958,70.432 91.958,69.242 R9.1
NetIC6_15: IC6.15 U3.15 | length 8.6
  L1(Sig) w0.11: v1(86.24,73.232) 86.21,73.262 86.21,74.035 90.375,78.2 IC6.15
  L4(Sig) w0.11: v1(86.24,73.232) 86.245,73.237 86.245,74.145 U3.15
NetIC6_16: IC6.16 R10.1 | length 2.5
  L1(Sig) w0.11: v1(90.271,79.055) 90.271,79.158 90.47,79.358 90.748,79.358 91.09,79.7 IC6.16
  L4(Sig) w0.11: v1(90.271,79.055) 90.271,79.025 90.5,78.796 90.5,78.4 R10.1
NetJ1_A5: 3.A5 R7.1 | length 2.4
  L1(Sig) w0.11: v1(83.75,62.5) 3.A5
  L4(Sig) w0.11: R7.1 v1(83.75,62.5)
NetJ1_B5: 3.B5 R8.1 | length 2.5
  L1(Sig) w0.11: v1(86.499,62.512) 86.499,62.597 86.75,62.848 3.B5
  L4(Sig) w0.11: R8.1 v1(86.499,62.512)
RX: IC5.1 IC6.11 | length 5.6
  L1(Sig) w0.11: v1(90,72.2) IC6.11
  L4(Sig) w0.11: v1(90,72.2) 90.474,72.2 92.484,74.21 92.484,75.079 IC5.1
TX: IC5.3 IC6.12 | length 3.9
  L1(Sig) w0.11: v1(90,73.7) IC6.12
  L4(Sig) w0.11: v1(90,73.7) 90.072,73.628 90.661,73.628 91.5,74.468 IC5.3
Vbat: C18.2 C21.2 C42.2 C44.2 FB2.2 IC1.6 IC2.6 IC3.3 IC3.4 | length 10.2
  L1(Sig) w0.25: IC1.6 79.35,64.65 81.45,66.75 v1(81.5,66.75) ; v1(86.8,67.1) 86.825,67.125 88.025,67.125 IC2.6
  L4(Sig) w0.25: v1(81.5,66.75) 81.5,66.8 81.8,67.1 v1(86.8,67.1)
  other v1: 78.2,62.7 78.8,62.7
VDD: 3.A4B9 3.B4A9 C25.2 C27.2 FB1.1 | length 3.5
  L1(Sig) w0.5: 3.A4B9 v1(82.6,65.6) ; 3.B4A9 v1(87.4,65.6)
Vin: C22.2 C32.2 C34.2 D2.A FB1.2 IC3.1 IC3.2 | length 3.9
  L1(Sig) w0.25: D2.A 74.5,65.65 74.675,65.825 74.675,65.975 v1(75.1,66.4)
  L4(Sig) w0.25: v1(75.1,66.4) 76.795,66.4 77.325,65.87 77.325,65.675 C34.2
pads on no net: 3.A6 3.A7 3.A8 3.B6 3.B7 3.B8 3.MH AC1.2 AC1.3 AC1.7 AC1.10 AC1.11 IC1.5 IC2.4 IC3.7 IC6.13 IC6.14 IC6.17 IC6.18 U3.3 U3.5 U3.6 U3.7 U3.8 U3.12 U3.14

## Polygon pours and split planes (outlines as drawn)
GND on L1(Sig) "GND_L01_P013" (solid, remove dead copper, pour order 13): 73,57.5 77.4,57.5 cw(c78,57.5) 78,58.1 cw(c78,57.5) 78.6,57.5 91.4,57.5 cw(c92,57.5) 92,58.1 cw(c92,57.5) 92.6,57.5 97,57.5 ccw(c97,58) 97.5,58 97.5,83 ccw(c96.75,83) 96.75,83.75 73.25,83.75 ccw(c73.25,83) 72.5,83 72.5,58 ccw(c73,58)
3v3 on L1(Sig) "3V3_L01_P010" (solid, remove dead copper, pour order 10): 78.4,65.7 79,65.7 79,66.7 79.6,67.3 80.1,67.3 80.1,67.994 77.4,67.994 77.4,67.3 78.1,67.3 78.4,67
Vbat on L1(Sig) "VBAT_L01_P001" (solid, remove dead copper, pour order 1): 77.9,61.4 79.1,61.4 79.1,63.1 79.1,64.952 78.8,64.952 78.8,63.5 78.5,63.1 77.9,63.1
NetBAT+_1 on L1(Sig) "NETBAT+_1_L01_P000" (solid, pour order 0): 77,58.8 79,58.8 79,60.8 77.655,60.795 77.5,61 77.5,62.2 76.9,62.2 76.2,61.5 74.9,61.5 74.9,60.9 76.7,60.9 77,60.6
GND on L4(Sig) "GND_L04_P014" (solid, remove dead copper, pour order 14): 73,57.5 77.4,57.5 cw(c78,57.5) 78,58.1 cw(c78,57.5) 78.6,57.5 91.4,57.5 cw(c92,57.5) 92,58.1 cw(c92,57.5) 92.6,57.5 97,57.5 ccw(c97,58) 97.5,58 97.5,83 ccw(c96.75,83) 96.75,83.75 73.25,83.75 ccw(c73.25,83) 72.5,83 72.5,58 ccw(c73,58)
Vin on L4(Sig) "VIN_L04_P006" (solid, remove dead copper, pour order 6): 77.047,63.457 77.8,63.457 77.8,64.1 78.109,64.409 79.332,64.409 80.149,65.349 80.7,65.349 80.7,66.045 77.2,66.045 77.2,64.8 77.047,64.647
Vbat on L4(Sig) "VBAT_L04_P004" (solid, remove dead copper, pour order 4): 77,63.15 79.1,63.15 79.1,60.2 77.2,60.2 76.5,60.9 76.5,61.5 76.84,61.5 77,61.66 77,62.4
VDD on L4(Sig) "VDD_L04_P005" (solid, remove dead copper, pour order 5): 87.642,65.291 83.5,65.291 83.5,64.5 81.754,64.5 81.754,64.746 81.1,65.357 81.1,66.044 87.653,66.044
GND on L3(GND) (split plane): 96.813,83.233 96.871,83.209 96.921,83.171 96.959,83.121 96.983,83.063 96.99,83.009 96.99,83 96.99,58.01 92.984,58.01 92.962,58.055 92.881,58.176 92.785,58.285 92.676,58.381 92.555,58.462 92.425,58.526 92.287,58.573 92.145,58.601 92.002,58.61 92,58.61 91.998,58.61 91.855,58.601 91.713,58.573 91.575,58.526 91.445,58.462 91.324,58.381 91.215,58.285 91.119,58.176 91.038,58.055 91.016,58.01 78.984,58.01 78.962,58.055 78.881,58.176 78.785,58.285 78.676,58.381 78.555,58.462 78.425,58.526 78.287,58.573 78.145,58.601 78.002,58.61 78,58.61 77.998,58.61 77.855,58.601 77.713,58.573 77.575,58.526 77.445,58.462 77.324,58.381 77.215,58.285 77.119,58.176 77.038,58.055 77.016,58.01 73.01,58.01 73.01,83 73.01,83.009 73.017,83.063 73.041,83.121 73.079,83.171 73.129,83.209 73.187,83.233 73.241,83.24 73.25,83.24 96.75,83.24 96.759,83.24
GND on L2(GND) (split plane): 96.813,83.233 96.871,83.209 96.921,83.171 96.959,83.121 96.983,83.063 96.99,83.009 96.99,83 96.99,58.01 92.984,58.01 92.962,58.055 92.881,58.176 92.785,58.285 92.676,58.381 92.555,58.462 92.425,58.526 92.287,58.573 92.145,58.601 92.002,58.61 92,58.61 91.998,58.61 91.855,58.601 91.713,58.573 91.575,58.526 91.445,58.462 91.324,58.381 91.215,58.285 91.119,58.176 91.038,58.055 91.016,58.01 78.984,58.01 78.962,58.055 78.881,58.176 78.785,58.285 78.676,58.381 78.555,58.462 78.425,58.526 78.287,58.573 78.145,58.601 78.002,58.61 78,58.61 77.998,58.61 77.855,58.601 77.713,58.573 77.575,58.526 77.445,58.462 77.324,58.381 77.215,58.285 77.119,58.176 77.038,58.055 77.016,58.01 73.01,58.01 73.01,83 73.01,83.009 73.017,83.063 73.041,83.121 73.079,83.171 73.129,83.209 73.187,83.233 73.241,83.24 73.25,83.24 96.75,83.24 96.759,83.24

## Keep-outs
Keep-Out Layer:
  lines w0.3: 72.5,58 ccw(c73,58) 73,57.5 77.4,57.5 cw(c78,57.5) 78,58.1 cw(c78,57.5) 78.6,57.5 91.4,57.5 cw(c92,57.5) 92,58.1 cw(c92,57.5) 92.6,57.5 97,57.5 ccw(c97,58) 97.5,58 97.5,83 ccw(c96.75,83) 96.75,83.75 94.25,83.75 75.75,83.75 73.25,83.75 ccw(c73.25,83) 72.5,83 72.5,58

## Silkscreen, mask and mechanical layers (free items; w line width, h text height)
Top Overlay:
  text "RST" at 93.337,80.397 h1.5 r90
  text "BOOT" at 93.383,72.8 h1.5 r90
  text "ON/OFF" at 92.633,61.85 h1.5 r90

## Text inside footprints (layer, text, board x,y; h text height)
D1: Mechanical 13 "+" at 79.033,67.142 h0.5 r180
D2: Mechanical 13 "+" at 74.958,67.033 h0.5 r270